# Allegro board XR871GT_REF_Simple_L4_V1_0-20170701.brd
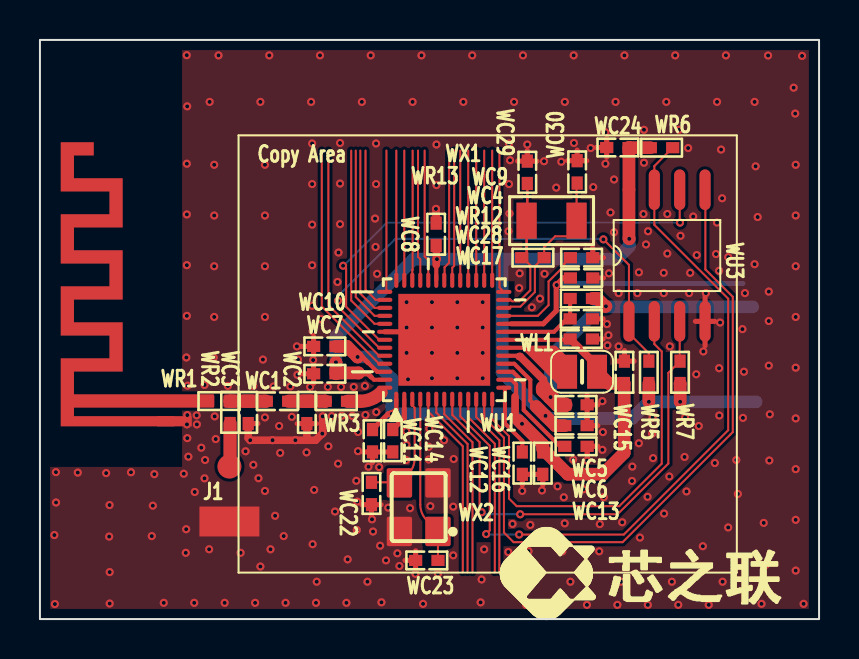
[diagram p0: board, top side]
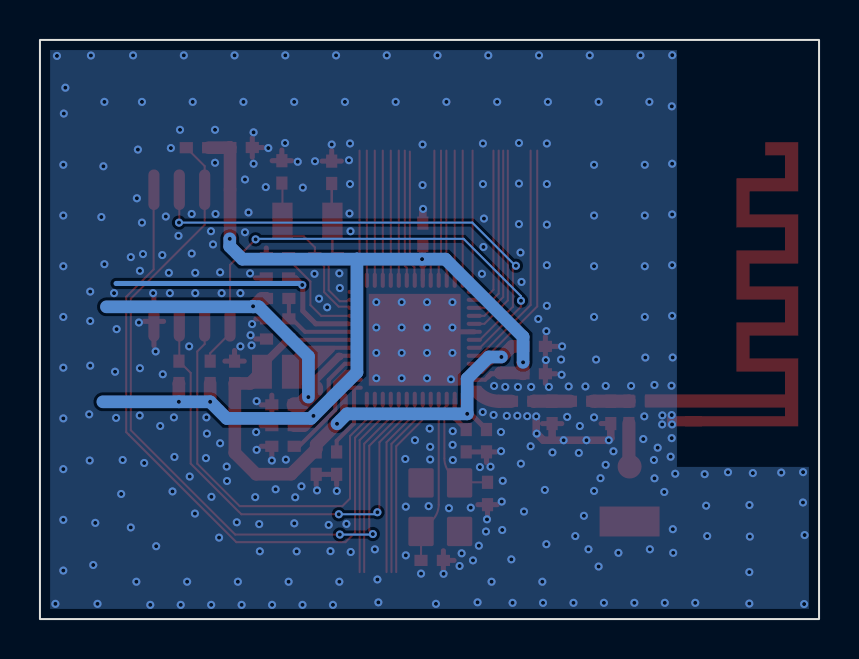
[diagram p1: board, bottom side, seen from below]

Outline 39 x 29 mm; copper layers: TOP, L2, L3, BOTTOM. Coordinates in mm from the lower left corner of the outline.
Outline path: rectangle 0,0 39,29

## Design rules (mm)
net group RF: nets ANT N16735516 N16735520

## Placement (name value [footprint] x y rotation side)
J1  ANT  [ANT2]  9.48 6.14 0 top
NOREF  -  []  0 29 0 top
NOREF#2  -  []  0 0 90 top
NOREF#3  -  []  0.51 7.62 90 top
NOREF#4  -  []  1.04 9.65 90 top
NOREF#5  -  []  0 29 0 top
NOREF#6  -  []  4.14 22.07 0 top
NOREF#7  -  []  0.51 7.62 90 top
WC1  0R  [C0402]  11.89 10.91 180 top
WC2  NC  [C0402]  13.36 10.35 90 top
WC3  NC  [C0402]  10.43 10.35 90 top
WC4  4.7uF  [C0402]  27.11 17.08 180 top
WC5  4.7uF  [C0402]  26.83 10.73 0 top
WC6  4.7uF  [C0402]  26.83 9.69 0 top
WC7  104  [C0402]  14.26 12.28 0 top
WC8  104  [C0402]  19.83 19.27 90 top
WC9  1uF  [C0402]  27.11 18.1 180 top
WC10  104  [C0402]  14.26 13.66 0 top
WC11  104  [C0402]  16.65 8.93 90 top
WC12  4.7uF  [C0402]  24.15 7.81 90 top
WC13  4.7uF  [C0402]  26.83 8.65 180 top
WC14  1uF  [C0402]  17.66 8.93 90 top
WC15  4.7uF  [C0402]  29.26 12.35 90 top
WC16  NC-104  [C0402]  25.17 7.81 90 top
WC17  NC-104  [C0402]  27.1 14.02 180 top
WC22  20pF  [C0402]  16.6 6.29 90 top
WC23  20pF  [C0402]  19.36 2.94 180 top
WC24  104  [C0402]  28.93 23.61 180 top
WC28  100pF  [C0402]  27.1 15.03 180 top
WC29  18pF  [C0402]  24.4 22.37 90 top
WC30  18pF  [C0402]  26.89 22.39 90 top
WL1  3.3uH-1.0A DCR<0.2R  [L0806]  27.14 12.39 0 top
WR1  0R  [R0402]  8.96 10.91 180 top
WR2  NC-0R  [R0402]  9.52 10.35 270 top
WR3  0R-NC  [R0402]  14.84 10.91 180 top
WR5  100K-NC  [R0402]  30.48 12.35 270 top
WR6  NC-100K  [R0402]  31.11 23.6 180 top
WR7  NC-100K  [R0402]  32.04 12.35 270 top
WR12  10K  [R0402]  27.1 16.05 0 top
WR13  NC-10M  [R0402]  24.68 18.1 180 top
WU1  XR871G  [QFN52P0_4B6X6_NOSOCKET]  20.24 13.98 0 top
WU3  PN25F16BSSIUG  [SOIC-8]  31.39 18.2 90 top
WX1  32768_FC-135  [XATL-FC-135]  25.61 19.95 180 top
WX2  24MHz-E3SB24E004304E  [CRY-TSX3225]  18.96 5.6 180 top

## Library data of the parts
J1 = ANT_0
WC1-WC9 WC12-WC15 WC23 WC24 = CAPACITOR
WC10 WC11 WC16 WC17 WC22 WC28-WC30 = CAPACITOR_0
WL1 = INDUCTOR
WR1-WR3 WR5-WR7 = R
WR12 WR13 = R1 0805
WU1 = XR871G
WU3 = SPI-NOR-SO8
WX1 = CRYSTAL_32.768K_FC-135
WX2 = Crystal4Pin_0

## Footprints (pads in the part's own frame, mm; a bottom-side part is the same pattern mirrored in y, then rotated)
ANT2
  round 1.2 smd: 1(0,1.5)
  rect 3x1.5 smd: 2(0,-1.25)
C0402
  rect 0.66x0.56 smd: 1(-0.56,0) 2(0.56,0)
CRY-TSX3225
  custom 1.27x1.47 smd: 1(-0.965,1.215) 2(-0.965,-1.215) 3(0.965,-1.215) 4(0.965,1.215)
L0806
  rect 1x1.7 smd: 1(0.75,0) 2(-0.75,0)
QFN52P0_4B6X6_NOSOCKET
  oval 0.203x0.762 smd: 1(-2.4,-2.981) 2(-2,-2.981) 3(-1.6,-2.981) 4(-1.2,-2.981) 5(-0.8,-2.981) 6(-0.4,-2.981) 7(0,-2.981) 8(0.4,-2.981) 9(0.8,-2.981) 10(1.2,-2.981) 11(1.6,-2.981) 12(2,-2.981) 13(2.4,-2.981) 27(2.4,2.981) 28(2,2.981) 29(1.6,2.981) 30(1.2,2.981) 31(0.8,2.981) 32(0.4,2.981) 33(0,2.981) 34(-0.4,2.981) 35(-0.8,2.981) 36(-1.2,2.981) 37(-1.6,2.981) 38(-2,2.981) 39(-2.4,2.981)
  oval 0.762x0.203 smd: 14(2.981,-2.4) 15(2.981,-2) 16(2.981,-1.6) 17(2.981,-1.2) 18(2.981,-0.8) 19(2.981,-0.4) 20(2.981,0) 21(2.981,0.4) 22(2.981,0.8) 23(2.981,1.2) 24(2.981,1.6) 25(2.981,2) 26(2.981,2.4) 40(-2.981,2.4) 41(-2.981,2) 42(-2.981,1.6) 43(-2.981,1.2) 44(-2.981,0.8) 45(-2.981,0.4) 46(-2.981,0) 47(-2.981,-0.4) 48(-2.981,-0.8) 49(-2.981,-1.2) 50(-2.981,-1.6) 51(-2.981,-2) 52(-2.981,-2.4)
  rect 4.597x4.597 smd: 53(0,0)
R0402
  rect 0.66x0.56 smd: 1(-0.56,0) 2(0.56,0)
SOIC-8
  oval 2.032x0.559 smd: 1(-3.296,1.905) 2(-3.296,0.635) 3(-3.296,-0.635) 4(-3.296,-1.905) 5(3.296,-1.905) 6(3.296,-0.635) 7(3.296,0.635) 8(3.296,1.905)
XATL-FC-135
  rect 1.016x1.803 smd: 1(-1.25,0) 2(1.25,0)

## Nets
GND: J1.2 WC2.1 WC3.1 WC4.1 WC5.2 WC6.2 WC7.1 WC8.2 WC9.1 WC10.1 WC11.1 WC12.1 WC13.1 WC14.1 WC15.2 WC16.1 WC17.1 WC22.1 WC23.2 WC24.2 WC28.1 WC29.2 WC30.2 WU1.45(TEST) WU1.53(EPAD) WU3.4(VSS) WX2.2 WX2.4(5)
VCC-BAT: WC5.1 WR12.2 WU1.18(VCC)
VDD25-EF: WC4.2 WU1.22(VDD25_EF)
VDD-3V3: WC6.1 WC7.2 WC8.1 WC24.1 WR5.2 WR6.2 WR7.2 WU1.17(VDD_3V3) WU1.34(VDD_IO) WU1.51(VDD33_PA) WU3.8(VCC)
ANT: WC1.1 WC2.2 WR3.2
CHIP-PWD: WC28.2 WR12.1 WU1.21(CHIP_PWD)
HXTAL1: WC23.1 WU1.4(HXTAL1) WX2.1
HXTAL2: WC22.2 WU1.3(HXTAL2) WX2.3
LXTAL1: WC29.1 WR13.2 WU1.25(LXTAL1) WX1.2
LXTAL2: WC30.1 WR13.1 WU1.24(LXTAL2) WX1.1
PA0: WU1.5(PA0/SPI1_MOSI/SD_CMD/UART0_TX/C)
PA1: WU1.6(PA1/SPI1_MISO/SD_DATA0/UART0_RX)
PA2: WU1.11(PA2/SPI1_CLK/SD_CLK/TWI1_SCL/CS)
PA3: WU1.10(PA3/SPI1_CS0/SD_DATA1/TWI1_SDA/)
PA4: WU1.35(PA4/WUPIO0/UART1_CTS/SD_DATA2/T)
PA5: WU1.36(PA5/WUPIO1/UART1_RTS/SD_DATA3/T)
PA6: WU1.37(PA6/WUPIO2/UART1_TX/SPI1_CS1/TW)
PA7: WU1.38(PA7/WUPIO3/UART1_RX/SPI1_CS2/TW)
PA8: WU1.26(PA8/ADC_CH0/PWM0/TWI1_SCL/CSI_P)
PA9: WU1.27(PA9/ADC_CH1/PWM1/TWI1_SDA/CSI_M)
PA10: WU1.28(PA10/ADC_CH2/PWM2/DMIC_CLK/CSI_)
PA11: WU1.29(PA11/ADC_CH3/PWM3/DMIC_DATA/CSI)
PA12: WU1.30(PA12/ADC_CH4/PWM4/I2S_MCLK/IR_T)
PA13: WU1.31(PA13/ADC_CH5/PWM5/I2S_BCLK/32KO)
PA14: WU1.32(PA14/ADC_CH6/PWM6/I2S_DI/IR_RX/)
PA15: WU1.33(PA15/ADC_CH7/PWM7/I2S_DO/UART1_)
PA16: WU1.7(PA16/IR_TX/IR_RX/I2S_LRCLK/UART)
PA17: WU1.39(PA17/WUPIO4/TWI0_SCL/IR_RX/TWI1)
PA18: WU1.40(PA18/WUPIO5/TWI0_SDA/IR_TX/TWI1)
PA19: WU1.41(PA19/WUPIO6/NUART_CTS/NSWD_TMS/)
PA20: WU1.42(PA20/WUPIO7/NUART_RTS/NSWD_TCK/)
PA21: WU1.43(PA21/WUPIO8/NUART_TX/DMIC_CLK/P)
PA22: WU1.44(PA22/WUPIO9/NUART_RX/DMIC_DATA/)
PCBANT: WR1.2
SPI0-CLK: WU1.46(PB7/SPI0_CLK/SD_CLK/FLASH_CLK/E) WU3.6(CLK)
SPI0-CS: WR5.1 WU1.47(PB6/SPI0_CS0/FLASH_CS/EINTB6) WU3.1(CS#)
SPI0-HOLD: WR6.1 WU1.9(PB3/SWD_TCK/JTAG_TDI/PWM7/FLASH) WU3.7(HOLD#)
SPI0-MISO: WU1.13(PB5/SPI0_MISO/SD_DATA0/FLASH_MI) WU3.2(MISO)
SPI0-MOSI: WU1.12(PB4/SPI0_MOSI/SD_CMD/FLASH_MOSI) WU3.5(MOSI)
SPI0-WP: WR7.1 WU1.8(PB2/SWD_TMS/JTAG_TDO/PWM6/FLASH) WU3.3(WP#)
UART0-RX: WU1.48(PB1/UART0_RX/JTAG_TCK/PWM5/SWD_)
UART0-TX: WU1.49(PB0/UART0_TX/JTAG_TMS/PWM4/SWD_)
N16732104: WC10.2 WC11.2 WC15.1 WC16.2 WC17.2 WL1.1 WU1.1(VDD14_RX) WU1.15(VDD14_DIG) WU1.20(VDD_SENSE) WU1.50(VDD14_TX)
N16732180: WR3.1 WU1.52(ANT)
N16732230: WL1.2 WU1.19(VDD_VLX)
N16732278: WC14.2 WU1.2(VDD12_CLK)
N16732320: WC13.2 WU1.16(VDD12_DIG)
N16732574: WC12.2 WU1.14(VDD12_SRAM)
N16732608: WC9.2 WU1.23(VDD_RTC)
N16735516: J1.1 WR2.2
N16735520: WC1.2 WC3.2 WR1.1 WR2.1

## Via types
v1: diameter 0.406, hole 0.203, TOP to BOTTOM, 352 vias

## Routing (per net, layer and track width the routed paths; a pad name or vN(x,y) marks a point on that pad's centre or on a via; arc(x,y) is an arc through that point)
GND: length 37.6
  TOP w0.254: WC24.2 28.37,24.1 ; WC24.2 27.84,23.61 ; WC24.2 28.37,23.13 ; WC22.1 17.08,5.73 ; WC22.1 16.6,5.2 ; WC22.1 16.11,5.73 ; 26.41,22.95 WC30.2 ; WC30.2 26.89,23.49 ; WC30.2 27.37,22.95 ; 13.17,12.28 WC7.1 ; WC7.1 13.7,12.77 ; WC7.1 13.7,11.8 ; WC10.1 v1(12.86,13.66) ; WC10.1 13.7,13.17 ; WC10.1 13.7,14.14 ; WC29.2 24.88,22.93 ; WC29.2 24.4,23.47 ; WC29.2 23.91,22.93 ; WC4.1 28.21,17.08 ; WC14.1 WC11.1 ; WC11.1 16.65,7.84 ; WC11.1 16.16,8.37 ; 28.77,12.91 WC15.2 ; WC15.2 29.74,12.91 ; WC15.2 29.26,13.45 ; 32.81,14.91 WU3.4 ; WU3.4 33.29,13.69 ; WU3.4 33.29,16.13 ; WU3.4 33.78,14.91 ; 18.8,2.45 WC23.2 ; WC23.2 18.27,2.94 ; WC23.2 18.8,3.42 ; 27.67,18.58 WC9.1 28.21,18.1 ; 24.63,7.25 WC12.1 24.15,6.71 ; 25.17,6.71 WC16.1 24.69,7.25 ; WU1.45 19.84,14.38 WU1.53 ; WC5.2 27.93,10.73 ; WC5.2 27.39,10.24 ; WC5.2 27.39,11.21 ; 27.39,10.17 WC6.2 27.93,9.69 ; 27.39,8.17 WC13.1 27.93,8.65 ; WC3.1 10.91,9.79 ; WC28.1 28.19,15.03 ; 13.85,9.79 WC2.1 12.88,9.79 ; WC17.1 28.19,14.02
  TOP w0.381: 13.27,8.96 v1(12.79,8.96) v1(11.64,8.96) v1(10.53,8.96) 10.43,9.06 WC3.1 ; 13.27,8.96 13.8,8.96 v1(14.13,9.29) 14.16,9.31 v1(14.16,10.15) ; 13.27,8.96 13.36,9.05 WC2.1 ; WC8.2 19.83,20.53 v1(19.82,20.54) 19.83,20.55
  vias: v1(0.72,4.21) v1(0.75,0.75) v1(0.8,7.36) v1(0.8,5.84) v1(1.89,7.34) v1(3.31,7.31) v1(3.48,5.71) v1(3.46,4.13) v1(3.49,2.35) v1(3.49,0.78) v1(4.56,7.35) v1(5.65,5.68) v1(5.6,4.16) v1(5.73,7.26) v1(6.2,0.81) v1(7.2,7.28) v1(7.35,28.24) v1(7.35,22.8) v1(7.35,20.26) v1(7.35,17.72) v1(7.35,15.18) v1(7.33,13.1) v1(7.36,9.75) v1(7.32,4.5) v1(7.3,3.32) v1(7.37,25.67) v1(7.39,11.68) v1(7.38,10.22) v1(7.38,9.06) v1(7.43,8.13) v1(7.75,6.36) v1(7.72,0.81) v1(7.84,10.2) v1(7.85,9.75) v1(8.08,8.58) v1(8.24,11.72) v1(8.24,7.05) v1(8.27,7.97) v1(8.49,25.9) v1(8.47,3.5) v1(8.72,22.75) v1(8.72,20.21) v1(8.72,17.67) v1(8.72,15.13) v1(8.7,13.1) v1(8.75,10.15) v1(8.8,9.01) v1(8.94,28.23) v1(9.25,0.81) v1(9.41,11.67) v1(10.04,3.32) v1(10.29,8.4) v1(10.68,11.67) v1(10.68,7.72) v1(10.77,0.81) v1(10.94,7.05) v1(11.03,25.9) v1(11.03,2.63) v1(11.16,12.99) v1(11.26,22.75) v1(11.26,20.21) v1(11.26,17.67) v1(11.26,15.13) v1(11.26,10.1) v1(11.26,6.42) v1(11.48,28.23) v1(11.54,3.5) v1(11.69,11.65) v1(11.77,5.17) v1(11.97,9.67) v1(12.02,8.32) v1(12.2,4.16) v1(12.29,0.81) v1(12.53,11.65) v1(12.61,10.12) v1(12.91,12.99) v1(12.89,12.23) v1(13.35,8.35) v1(13.52,11.62) v1(13.57,25.9) v1(13.62,23.82) v1(13.62,21.78) v1(13.62,19.75) v1(13.62,17.72) v1(13.62,15.69) v1(13.65,14.42) v1(13.65,3.75) v1(13.68,12.97) v1(13.73,6.47) v1(13.85,1.87) v1(13.82,0.81) v1(14.02,28.23) v1(14.06,15.03) v1(14.41,11.62) v1(14.44,8.65) v1(14.61,10.16) v1(14.77,5.39) v1(14.95,18.35) v1(14.89,16.88) v1(14.92,7.78) v1(15.02,23.84) v1(15.02,21.81) v1(15.02,19.78) v1(15.07,11.62) v1(15.1,10.18) v1(15.34,0.81) v1(15.4,2.99) v1(15.63,10.18) v1(15.71,11.62) v1(15.83,6.92) v1(15.86,4.46) v1(15.92,9.37) v1(15.92,8.41) v1(15.89,5.88) v1(16.11,25.9) v1(16.27,11.67) v1(16.29,10.22) v1(16.45,7.63) v1(16.39,1.87) v1(16.56,28.23) v1(16.62,4.99) v1(16.67,4.38) v1(16.82,23.82) v1(16.82,21.78) v1(16.77,20.06) v1(16.8,18.63) v1(16.84,10.37) v1(16.88,17.29) v1(16.98,7.61) v1(17.03,3.67) v1(17.09,0.84) v1(17.32,2.94) v1(17.43,5.58) v1(17.89,3.29) v1(17.99,2.66) v1(18.35,15.87) v1(18.35,14.6) v1(18.35,13.33) v1(18.34,9.41) v1(18.34,8.72) v1(18.33,7.96) v1(18.43,12) v1(18.53,5.55) v1(18.65,25.9) v1(18.8,2.27) v1(19.1,28.23) v1(19.18,0.76) v1(19.49,9.54) v1(19.47,8.63) v1(19.47,7.99) v1(19.54,5.65) v1(19.62,15.87) v1(19.62,14.6) v1(19.62,13.33) v1(19.62,12.06) v1(19.85,23.76) v1(19.85,21.73) v1(19.92,2.28) v1(20.23,8.96) v1(20.71,8.02) v1(20.69,5.63) v1(20.69,3.19) v1(20.89,15.87) v1(20.89,14.6) v1(20.89,13.33) v1(20.89,12.06) v1(21.19,25.9) v1(21.64,28.23) v1(22.06,0.84) v1(22.16,15.87) v1(22.16,14.6) v1(22.16,13.33) v1(22.16,12.06) v1(22.11,1.98) v1(22.24,3.49) v1(23.45,19.42) v1(23.44,3.36) v1(23.48,23.82) v1(23.53,22.98) v1(23.48,21.78) v1(23.51,20.31) v1(23.66,4.77) v1(23.73,25.9) v1(24.01,17.31) v1(23.99,16.58) v1(24.01,1.87) v1(24.14,6.42) v1(24.18,28.23) v1(24.33,0.71) v1(24.39,23.76) v1(24.46,3.4) v1(24.55,4.71) v1(24.62,15.61) v1(25.03,16.04) v1(25.13,6.44) v1(25.23,22.93) v1(25.26,17.29) v1(25.84,21.61) v1(25.86,0.71) v1(25.91,6.65) v1(26.1,22.9) v1(26.15,3.39) v1(26.22,6.1) v1(26.27,25.9) v1(26.27,4.79) v1(26.55,1.87) v1(26.72,28.23) v1(26.73,23.84) v1(26.69,7.98) v1(27.2,6.5) v1(27.39,7.94) v1(27.38,0.71) v1(27.57,23.59) v1(27.7,21.63) v1(28.02,4.75) v1(27.99,3.39) v1(28.15,10.91) v1(28.15,8.47) v1(28.18,9.36) v1(28.22,6.11) v1(28.31,24.37) v1(28.31,22.8) v1(28.38,14.77) v1(28.46,14.21) v1(28.41,13.71) v1(28.56,20.36) v1(28.48,17.31) v1(28.74,22.01) v1(28.74,19.37) v1(28.81,25.9) v1(28.91,0.71) v1(28.97,16.32) v1(28.97,13.66) v1(29.15,4.85) v1(29.09,1.87) v1(29.26,28.23) v1(29.65,7.64) v1(29.64,6.91) v1(29.91,16.32) v1(29.98,17.36) v1(29.98,8.8) v1(30.03,4.08) v1(30.24,24.5) v1(30.24,22.85) v1(30.21,20.28) v1(30.34,18.76) v1(30.44,19.42) v1(30.42,6.12) v1(30.43,0.71) v1(30.64,9.29) v1(30.67,10.1) v1(30.69,8.06) v1(31.23,17.34) v1(31.23,16.32) v1(31.24,5.28) v1(31.35,25.9) v1(31.4,20.28) v1(31.4,18.3) v1(31.53,13.66) v1(31.5,7.14) v1(31.63,1.87) v1(31.8,28.23) v1(31.95,0.71) v1(31.99,24.5) v1(32.06,19.19) v1(32.29,10.1) v1(32.27,8.12) v1(32.45,23.59) v1(32.36,6.39) v1(32.55,17.34) v1(32.5,16.32) v1(32.7,20.16) v1(32.85,12.26) v1(32.88,18.23) v1(32.98,9.67) v1(33.21,13.4) v1(33.18,3.65) v1(33.33,16.32) v1(33.48,0.71) v1(33.84,18.28) v1(33.78,7.82) v1(33.89,25.9) v1(33.89,19.85) v1(34,17.44) v1(34.05,14.85) v1(34,12.56) v1(34.01,10.19) v1(34.1,23.51) v1(34.15,21.07) v1(34.17,1.87) v1(34.34,28.23) v1(34.45,18.13) v1(34.45,4.59) v1(34.86,7.97) v1(34.94,6.26) v1(35.16,14.52) v1(35.24,12.39) v1(35.19,10.07) v1(35.29,16.32) v1(35.77,25.9) v1(35.82,22.67) v1(35.77,17.77) v1(35.93,20.13) v1(36.12,0.76) v1(36.23,4.82) v1(36.33,2.71) v1(36.45,28.22) v1(36.48,16.4) v1(36.48,14.93) v1(36.48,12.69) v1(36.54,10.25) v1(36.51,7.94) v1(37.73,26.61) v1(37.81,25.31) v1(37.83,22.75) v1(37.83,20.21) v1(37.83,17.67) v1(37.83,15.13) v1(37.83,12.59) v1(37.83,10.05) v1(37.83,7.51) v1(37.83,4.97) v1(37.83,2.43) v1(38.15,28.2) v1(38.23,0.76)
VCC-BAT: length 18.4
  TOP w0.203: 23.95,13.18 WU1.18
  TOP w0.254: 23.99,13.15 23.95,13.18
  TOP w0.381: 25.21,11.57 25.21,11.98 24.04,13.15 23.99,13.15
  TOP w0.635: 27.71,16.05 27.9,16.05 28.3,15.66 v1(28.33,15.66) ; 27.71,16.05 27.72,16.05 ; 27.71,16.05 WR12.2
  TOP w0.762: 25.21,11.57 25.21,11.47 v1(25.56,11.12) 25.95,10.73 WC5.1
  BOTTOM w0.635: 35.67,15.64 28.36,15.64 v1(28.33,15.66) 28.31,15.64 28.05,15.64 25.56,13.15 v1(25.56,11.12)
VDD25-EF: length 14.4
  TOP w0.203: 23.6,14.78 WU1.22
  TOP w0.254: v1(25.87,16.73) 25.84,16.73 ; 25.84,16.73 25.84,15.43 25.19,14.78 23.6,14.78 ; 25.84,16.73 26.2,17.08 WC4.2
  BOTTOM w0.254: 35.19,16.8 25.94,16.8 v1(25.87,16.73)
VDD-3V3: length 55.3
  TOP w0.203: 16.58,12.12 16.71,11.98 WU1.51 ; WU1.17 23.74,12.78 24.55,11.98 24.55,10.94 24.84,10.65 ; 19.84,17.74 WU1.34
  TOP w0.254: 16.58,12.12 16.42,12.28 15.99,12.28 15.95,12.32
  TOP w0.381: 19.84,17.74 19.84,17.99 v1(19.87,18.02) 19.85,18.05 19.85,18.69 WC8.1
  TOP w0.635: v1(29.5,19.04) 29.48,19.06 WU3.8 29.48,23.61 WC24.1 29.5,23.6 WR6.2 ; v1(32.05,10.88) 32.05,11.79 WR7.2 ; WC6.1 25.8,9.69 v1(25.31,10.18) 24.84,10.65 ; WR5.2 v1(30.48,10.88) ; v1(14.82,12.86) 14.82,12.83 14.82,12.83 WC7.2 14.86,12.33 15.94,12.33 15.95,12.32
  BOTTOM w0.635: 35.85,10.88 v1(32.05,10.88) v1(30.48,10.88) 29.65,10.05 25.44,10.05 v1(25.31,10.18) 23.13,12.35 23.13,18.02 ; 23.13,18.02 23.13,18.02 28.86,18.02 29.5,18.66 v1(29.5,19.04) ; 23.13,18.02 v1(19.87,18.02) 18.7,18.02 14.82,14.13 v1(14.82,12.86)
ANT: length 2
  TOP w0.102: WC2.2 13.57,10.91 13.57,10.91
  TOP w0.66: WC1.1 14.27,10.91 WR3.2
CHIP-PWD: length 4.6
  TOP w0.203: WR12.1 WC28.2 26.38,15.03 25.73,14.38 WU1.21
HXTAL1: length 8.4
  TOP w0.102: WU1.4 19.04,5.73 arc(19.12,5.31) 19.36,4.95 WX2.1 19.92,2.94 WC23.1
HXTAL2: length 5.9
  TOP w0.102: WU1.3 18.64,10.7 18.76,10.58 18.76,8.04 arc(18.67,7.62) 18.43,7.25 WX2.3 17.96,6.85 WC22.2
LXTAL1: length 7.3
  TOP w0.102: WU1.25 23.56,15.98 23.63,15.92 23.99,15.92 24.55,16.47 24.55,17.72 24.17,18.1 WR13.2
  TOP w0.127: WC29.1 24.4,19.99 WX1.2 24.36,18.34 WR13.2
LXTAL2: length 8.7
  TOP w0.102: WC30.1 26.86,21.8 WX1.1 26.86,19.53 26.5,19.17 25.79,19.17 25.24,18.61 WR13.1 25.24,18.09 25.2,18.09 24.78,17.67 24.78,16.37 24.05,15.64 23.56,15.64 23.5,15.58 WU1.24
PA0: length 9.4
  TOP w0.102: WU1.5 19.44,10.38 21.17,8.65 21.17,2.35
PA1: length 9.3
  TOP w0.102: WU1.6 19.84,10.34 21.41,8.77 21.41,2.35
PA2: length 9.1
  TOP w0.102: WU1.11 21.84,10.11 23,8.96 23,2.35
PA3: length 9.2
  TOP w0.102: WU1.10 21.44,10.11 22.77,8.78 22.77,2.35
PA4: length 6.6
  TOP w0.102: WU1.35 19.44,17.98 19.26,18.16 19.26,23.46
PA5: length 6.5
  TOP w0.102: 18.93,23.46 18.93,18.13 19.04,18.02 WU1.36
PA6: length 6.5
  TOP w0.102: 18.65,23.46 18.65,17.49 18.64,17.47 WU1.37
PA7: length 6.5
  TOP w0.102: WU1.38 18.24,23.46
PA8: length 7.2
  TOP w0.102: WU1.26 23,16.6 23,23.46
PA9: length 6.5
  TOP w0.102: WU1.27 22.64,23.46
PA10: length 6.5
  TOP w0.102: WU1.28 22.24,23.46
PA11: length 6.5
  TOP w0.102: WU1.29 21.84,23.46
PA12: length 6.5
  TOP w0.102: WU1.30 21.44,23.46
PA13: length 6.5
  TOP w0.102: WU1.31 21.04,23.46
PA14: length 6.5
  TOP w0.102: WU1.32 20.64,17.6 20.74,17.69 20.74,23.46
PA15: length 6.5
  TOP w0.102: WU1.33 20.25,16.98 20.25,17.62 20.48,17.85 20.48,23.41
PA16: length 9.2
  TOP w0.102: WU1.7 20.24,10.27 21.65,8.85 21.65,2.35
PA17: length 6.5
  TOP w0.102: WU1.39 17.84,23.46
PA18: length 7.1
  TOP w0.102: WU1.40 17.34,16.47 17.34,23.46
PA19: length 8.1
  TOP w0.102: WU1.41 16.81,15.98 16.3,16.49 16.3,23.46
PA20: length 8.7
  TOP w0.102: WU1.42 16.75,15.58 16.04,16.3 16.04,23.46
PA21: length 9.2
  TOP w0.102: 15.81,23.46 15.81,16.13 16.75,15.18 WU1.43
PA22: length 9.7
  TOP w0.102: 15.58,23.46 15.58,15.95 16.75,14.78 WU1.44
SPI0-CLK: length 24.1
  TOP w0.102: WU1.46 16.98,13.98 15.33,15.64 15.33,17.54 v1(15.17,17.69) ; v1(32.04,19.85) 32.02,19.87 WU3.6
  BOTTOM w0.102: v1(32.04,19.85) 17.36,19.85 15.2,17.69 v1(15.17,17.69)
SPI0-CS: length 25.2
  TOP w0.102: v1(28.2,19.01) 29.48,17.73 WU3.1 29.48,14.31 30.48,13.31 WR5.1 ; WU1.47 16.98,13.58 14.92,15.64 v1(14.92,15.94)
  BOTTOM w0.102: v1(28.2,19.01) 28.18,19.04 17.79,19.04 14.92,16.17 v1(14.92,15.94)
SPI0-HOLD: length 37.8
  TOP w0.102: WR6.1 30.75,22.68 WU3.7 30.75,19.74 34.45,16.04 34.45,9.46 29.23,4.23 v1(23.99,4.23) ; v1(22.34,4.26) 22.51,4.43 22.51,8.68 21.04,10.15 WU1.9
  BOTTOM w0.102: v1(22.34,4.26) 22.36,4.23 v1(23.99,4.23)
SPI0-MISO: length 21.3
  TOP w0.102: WU3.2 30.75,13.77 31.13,13.4 31.13,7.78 29,5.65 23.86,5.65 23.48,6.04 23.48,9.16 22.64,10 WU1.13
SPI0-MOSI: length 33.7
  TOP w0.102: WU3.5 33.31,21.48 33.31,17.51 34.68,16.14 34.68,9.36 34.55,9.23 29.17,3.85 23.71,3.85 23.23,4.33 23.23,9.08 22.24,10.07 WU1.12
SPI0-WP: length 24.1
  TOP w0.102: v1(22.11,5.35) 22.01,5.45 22.01,8.85 20.64,10.22 WU1.8 ; v1(24.04,5.25) 28.92,5.25 31.46,7.79 31.46,12.33 WR7.1 32.02,12.93 WU3.3
  BOTTOM w0.102: v1(24.04,5.25) 22.21,5.25 v1(22.11,5.35)
UART0-RX: length 11.6
  TOP w0.102: 14.44,23.46 14.44,15.73 16.98,13.18 WU1.48
UART0-TX: length 12.1
  TOP w0.102: 14.11,23.46 14.11,15.66 16.98,12.78 WU1.49
N16732104: length 36.1
  TOP w0.102: WC15.1 29.25,11.79 29.25,11.8
  TOP w0.203: 17.84,10.5 WU1.1 ; WU1.50 16.88,12.38 16.42,12.84 ; 23.78,11.14 23.84,11.19 23.84,11.76 23.61,11.98 WU1.15 ; WC17.2 26.5,13.98 WU1.20
  TOP w0.254: v1(24.13,9.78) 24.13,9.78 ; WC11.2 17.43,10.28 v1(17.61,10.28) 17.84,10.5 ; WC16.2 25.17,8.51 ; 15.9,13.12 16.14,13.12 16.42,12.84
  TOP w0.381: WL1.1 27.89,12.68 26.55,14.02 WC17.2 ; 23.96,9.95 23.78,10.12 23.78,11.14
  TOP w0.635: WL1.1 28.47,11.8 29.25,11.8 29.25,8.32 28.18,7.25 26.43,7.25 25.17,8.51 25.17,8.74 23.96,9.95 ; v1(15.9,13.12) 15.9,13.12 15.37,13.66 WC10.2
  BOTTOM w0.635: v1(24.13,9.78) 23.63,10.28 v1(17.61,10.28) 17.61,12.04 16.53,13.12 v1(15.9,13.12)
N16732180: length 2.1
  TOP w0.102: 17.08,11.34 17.21,11.48 arc(17.25,11.53) WU1.52
  TOP w0.66: WR3.1 16.02,10.91 arc(16.59,11.02) 17.08,11.34
N16732230: length 2.6
  TOP w0.203: 25.77,13.55 25.73,13.58 WU1.19
N16732278: length 1.8
  TOP w0.203: 18.24,10.57 WU1.2
  TOP w0.254: 18.24,10.57 18.24,10.07 WC14.2
N16732320: length 5.4
  TOP w0.203: WU1.16 23.67,12.38 24.22,11.84 24.22,10.47 26.03,8.65 WC13.2
N16732574: length 3.6
  TOP w0.203: WU1.14 23.28,11.53 23.28,9.79 24.15,8.92 WC12.2
N16732608: length 5.3
  TOP w0.102: WC9.2 26.25,17.79 26.25,17.69 25.46,16.91 25.46,15.72 24.92,15.18 WU1.23
N16735516: length 2.2
  TOP w0.508: 9.52,7.67 9.52,7.64 J1.1
  TOP w0.66: WR2.2 9.52,7.67 J1.1
N16735520: length 2.7
  TOP w0.102: WC3.2 11.23,10.91 ; 11.23,10.91 11.23,10.91 ; 11.23,10.91 11.33,10.91
  TOP w0.66: WC1.2 9.52,10.91 WR2.1

## Copper pours and planes (outline as drawn; the poured copper is in the pictures)
GND on TOP, BOTTOM, L2, L3: 0.51,0.51 0.51,28.49 38.49,28.49 38.49,0.51
PCBANT on TOP (solid shape): 2.69,23.22 1.7,23.22 1.7,22.07 4.14,22.07 4.14,19.61 1.7,19.61 1.7,18.47 4.14,18.47 4.14,16 1.7,16 1.7,14.86 4.14,14.86 4.14,12.4 1.7,12.4 1.7,11.25 8.71,11.25 8.71,10.59 1.7,10.59 1.7,10.16 6.72,10.16 6.72,9.65 1.04,9.65 1.04,13.06 3.48,13.06 3.48,14.2 1.04,14.2 1.04,16.66 3.48,16.66 3.48,17.81 1.04,17.81 1.04,20.27 3.48,20.27 3.48,21.41 1.04,21.41 1.04,23.88 2.69,23.88
N16732230 on TOP (solid shape): 26.81,12.72 26.81,11.67 26.76,11.62 26.05,11.62 24.24,13.43 24.24,13.68 25.84,13.68

Small or netless copper shapes (teardrops, artwork), in the pictures only: 1 on TOP

## Text on the board
Ref Des/Silkscreen Top: Copy Area
